# Altium PCB PCB1.PcbDoc (part 2 of 2)
Units mil, origin at the board's own origin, x right, y up, seen from the top; angles counter-clockwise.
Board outline 2755.91 x 2755.91 mil, 4 copper layers (Top Layer, Layer 1, Layer 2, Bottom Layer), stack 23.756 mil thick; 63 components, 137 nets, 462 pads, 284 vias.
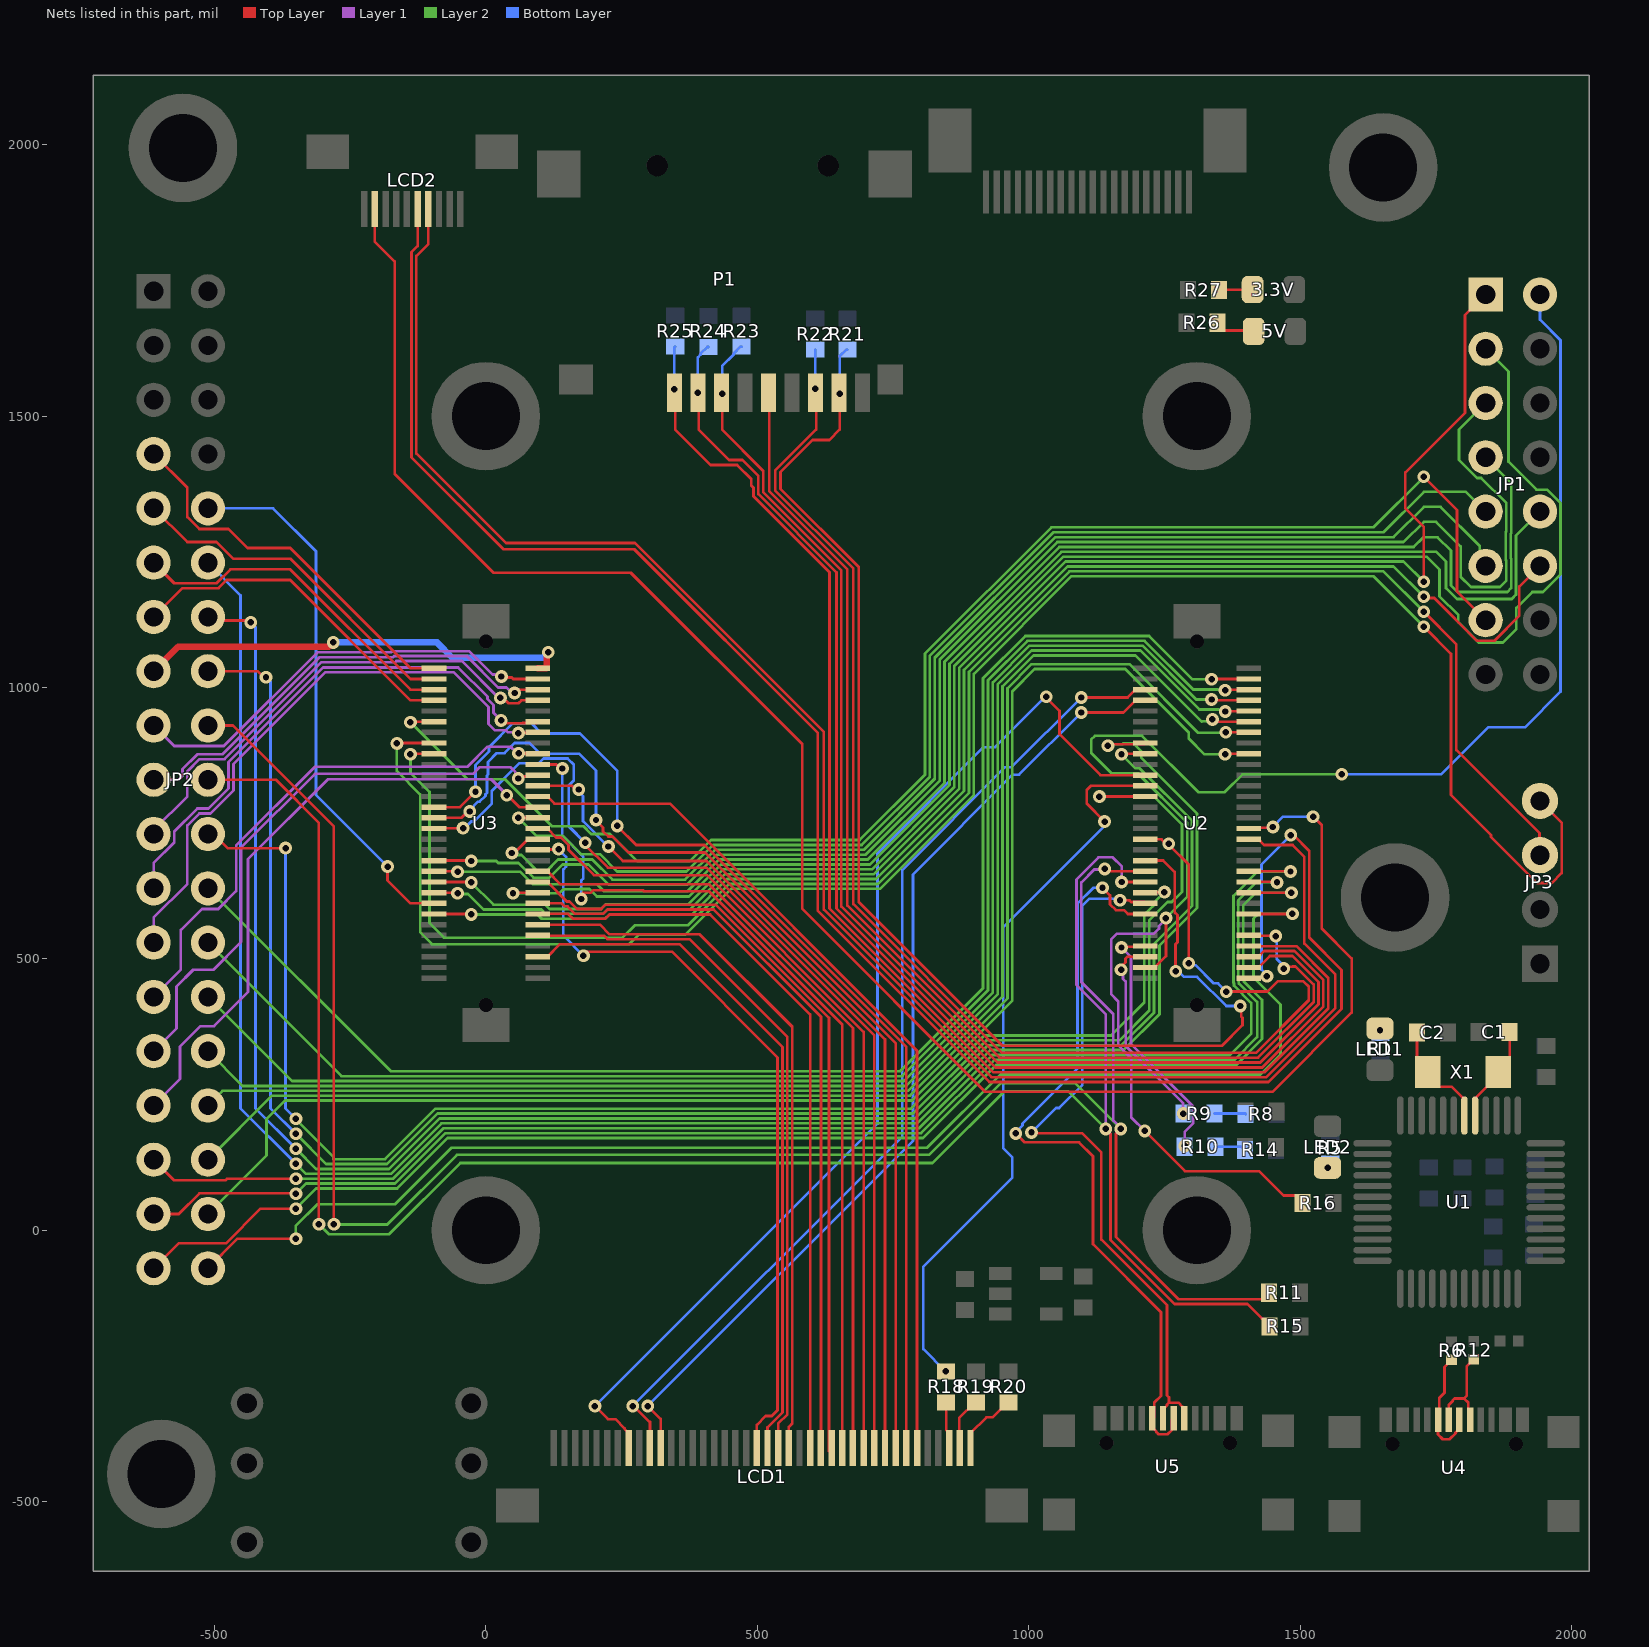
[diagram p4: the nets of this part, all layers, seen from the top]

## Via types
v1: diameter 23.62, hole 11.81, Top Layer to Bottom Layer, tented both sides, 284 vias

## Nets (pads, with @x,y where several pads share a name; then routed paths per layer and width w, separated by ;. In a path a pad name is that pad's centre, name@x,y a point inside that pad or via, vN(x,y) a via of type N, cw(c..) or ccw(c..) an arc to the next point about the centre after c; other vN are vias at no path point) (continued)
"LCD_G1 / PJ8": LCD1.20 U3.26 | length 1447.5
  Top Layer w5: U3.26@95.47,700.78 96.24,701.54 133.23,701.54 v1(134,702.31) ; v1(179.7,505.7) 179.7,513.3 342.61,513.3 537.47,318.45 537.47,-331.58 526.74,-342.31 515.19,-342.31 499.16,-358.34 LCD1.20@499.16,-401.24
  Bottom Layer w5: v1(134,702.31) 134,702 148,688 148,670.21 142.69,664.9 142.69,542.7 v1(179.7,505.7)
"LCD_G2 / PJ9": LCD1.27 U3.20 | length 1445.2
  Top Layer w5: U3.20@95.47,641.72 113.19,641.72 149.09,605.82 154.28,605.82 168.1,592 212.39,592 220.33,599.94 423.48,599.94 632,391.42 LCD1.27@632,-407
"LCD_G3 / PJ10": LCD1.26 U3.16 | length 1409.6
  Top Layer w5: U3.16@95.47,602.35 139.83,602.35 145.36,596.82 150.55,596.82 164.37,583 216.12,583 224.06,590.94 419.75,590.94 617.27,393.43 LCD1.26@617.27,-401.24
"LCD_G4 / PJ11": LCD1.25 U3.14 | length 1384.3
  Top Layer w5: U3.14@95.47,582.67 95.7,582.9 151.74,582.9 160.64,574 219.85,574 227.79,581.94 413.17,581.94 597.58,397.53 LCD1.25@597.58,-401.24
"LCD_G5 / PK0": LCD1.23 U3.12 | length 1325.7
  Top Layer w5: U3.12@95.47,562.98 210.13,562.98 227.79,545.32 394.11,545.32 564.47,374.97 564.47,-356 558.21,-362.26 LCD1.23@558.21,-401.24
"LCD_G6 / PK1": LCD1.22 U3.10 | length 1301.9
  Top Layer w5: U3.10@95.47,543.3 95.93,542.84 217.54,542.84 224.06,536.32 375.27,536.32 555.47,356.13 555.47,-339.04 538.53,-355.98 LCD1.22@538.53,-401.24
"LCD_G7 / PK2": LCD1.21 U3.6 | length 1289.3
  Top Layer w5: U3.6@95.47,503.93 113.19,503.93 136.48,527.22 356.53,527.22 546.47,337.29 546.47,-335.31 518.85,-362.93 LCD1.21@518.84,-401.24
"LCD_HS / PI12": LCD1.11 U2.53 | length 1829.7
  Top Layer w5: v1(298.18,-324) 321.99,-347.81 LCD1.11@321.99,-401.24 ; v1(1097,953.98) 1174.43,953.98 1196.82,976.37 U2.53@1214.54,976.37
  Bottom Layer w5: v1(298.18,-324) 786.89,164.71 786.89,655.6 970.64,839.36 982.38,839.36 v1(1097,953.98)
"LCD_R0 / PI15": LCD1.28 U3.42 | length 1681.8
  Top Layer w5: U3.42@95.47,858.26 129.7,858.26 137.27,850.69 v1(141,850.69) ; v1(175.68,610.31) 178.99,613.62 178.99,621.76 193.13,621.76 197.72,626.36 289.36,626.36 291.05,624.66 411.49,624.66 656.64,379.51 LCD1.28@656.64,-401.24
  Bottom Layer w5: v1(141,850.69) 141,727 179.31,688.69 179.31,648.04 175.91,644.64 175.91,610.54 v1(175.68,610.31)
"LCD_R1 / PJ0": LCD1.32 U3.38 | length 1609
  Top Layer w5: U3.38@94.1,817.51 U3.38@95.47,818.89 ; U3.38@104.33,818.89 159.07,818.89 165.96,812 v1(171,812) ; v1(225.71,707.01) 252.39,680.34 406.72,680.34 735.38,351.68 LCD1.32@735.38,-401.24
  Bottom Layer w5: v1(171,812) 171,807.76 179,799.76 179,753.73 225.44,707.29 225.71,707.29 v1(225.71,707.01)
"LCD_R2 / PJ1": LCD1.35 U3.36 | length 1625
  Top Layer w5: U3.36@95.47,799.2 113.19,799.2 126.39,786 339.25,786 794.43,330.81 LCD1.35@794.43,-401.24
"LCD_R3 / PJ2": LCD1.34 U3.33 | length 2013.5
  Top Layer w5: U3.33@-95.46,779.52 -47.48,779.52 v1(-19,808) ; v1(242,745) 277.13,709.87 402.65,709.87 774.75,337.77 LCD1.34@774.75,-401.24
  Bottom Layer w5: v1(-19,808) -19,857 5.93,881.93 5.93,889.93 50.35,934.35 83.65,934.35 102.69,915.31 173.51,915.31 242,846.82 v1(242,745)
"LCD_R4 / PJ3": LCD1.33 U3.31 | length 1976.1
  Top Layer w5: U3.31@-95.47,759.83 -45.34,759.83 -33.62,771.55 v1(-29.55,771.55) ; v1(202.95,755.95) 202.95,754.79 216.03,741.72 216.03,734.97 225.68,725.32 233.3,725.32 262.67,695.95 403.84,695.95 755.06,344.73 LCD1.33@755.06,-401.24
  Bottom Layer w5: v1(-29.55,771.55) -29.55,774.45 -14.31,789.69 -11.42,789.69 -0.69,800.42 -0.69,803.31 2,806 2,838 4,840 4,862.79 20.13,878.92 34.31,878.92 53.02,897.63 80.37,897.63 99.85,878.15 171.85,878.15 202.95,847.05 v1(202.95,755.95)
"LCD_R5 / PJ4": LCD1.31 U3.29 | length 1931.5
  Top Layer w5: U3.29@-95.46,740.15 -95.03,740.57 -42.43,740.57 v1(-42,741) ; v1(183,714) 183,710 224.89,668.11 406.22,668.11 715.69,358.64 LCD1.31@715.69,-401.24
  Bottom Layer w5: v1(-42,741) -39.17,741 -26.93,753.24 -21.97,753.24 11,786.21 11,809.72 61.95,860.67 98.04,860.67 106.37,869 150.74,869 162,857.74 162,828.9 152.69,819.58 152.69,744.31 v1(183,714)
"LCD_R6 / PJ5": LCD1.30 U3.30 | length 1527.7
  Top Layer w5: U3.30@95.47,740.15 113.19,740.15 129.52,723.81 138.4,723.81 152.31,709.9 152.31,701.02 199.14,654.19 407.41,654.19 696.01,365.6 LCD1.30@696.01,-401.24
"LCD_R7 / PJ6": LCD1.29 U3.22 | length 1474.3
  Top Layer w5: U3.22@95.47,661.41 113.19,661.41 137.28,637.31 411.57,637.31 676.32,372.55 LCD1.29@676.32,-401.24
"LCD_VS / PI13": LCD1.10 U2.55 | length 1870.7
  Top Layer w5: v1(270.56,-324) 272.29,-324 300.81,-352.53 302.31,-352.53 LCD1.10@302.31,-401.24 ; v1(1097,981.6) 1182.37,981.6 1196.82,996.05 U2.55@1214.54,996.05
  Bottom Layer w5: v1(270.56,-324) 767.2,172.65 767.2,663.75 956.73,853.27 968.68,853.27 v1(1097,981.6)
"LED / PC13": JP2.16 U2.35 | length 3318.2
  Top Layer w5: JP2.16@-512,1030 -421.04,1030 -410.04,1019 v1(-405,1019) ; v1(1130.4,799) 1130.6,799.2 U2.35@1214.54,799.2
  Layer 2 w5: v1(-350,177.87) -294.13,122 -182.1,122 -89.1,215 786.9,215 921.9,350 1167.54,350 1222,404.46 1222,571 1255.69,604.69 1263.69,604.69 1282.45,623.45 1282.45,747.82 1231.27,799 v1(1130.4,799)
  Bottom Layer w5: v1(-405,1019) -396.62,1010.62 -396.62,224.49 v1(-350,177.87)
NetC1_1: C1.1 U1.5 X1.1 | length 180.2
  Top Layer w5: U1.5@1822.53,211.45 1822.53,242.76 1865.11,285.34 X1.1@1865.11,291.25 1886.15,312.29 C1.1@1886.15,365.25
NetC2_1: C2.1 U1.6 X1.2 | length 180.8
  Top Layer w5: X1.2@1715.61,304.93 C2.1@1715.61,364.25 ; X1.2@1735.19,291.25 1735.19,285.34 1756.31,264.22 1779.6,264.22 1802.84,240.98 U1.6@1802.84,211.45
NetLCD1_38: LCD1.38 R18.1 | length 86.4
  Top Layer w5: R18.1@848,-317.09 848,-368.2 853.49,-373.69 LCD1.38@853.49,-401.24
NetLCD1_39: LCD1.39 R19.1 | length 98.7
  Top Layer w5: LCD1.39@873.17,-401.24 872,-400.07 872,-346.03 901.03,-317 R19.1@903,-317
NetLCD1_40: LCD1.40 R20.1 | length 121.2
  Top Layer w5: LCD1.40@892.86,-401.24 892.86,-373.69 922,-344.54 933.49,-344.54 961.03,-317 R20.1@963,-317
NetLED1_1: LED1.1 R1.2 | length 3
  Top Layer w5: v1(1647.22,368.69) LED1.1@1647.22,371.69
NetLED2_1: LED2.1 R5.2 | length 0.4
  Top Layer w5: LED2.1@1550.78,114.91 v1(1550.78,115.31)
NetLED3_1: 5V.1 R26.2 | length 74.8
  Top Layer w5: R26.2@1347.54,1672 1347.54,1670.03 1359.81,1657.77 1412.82,1657.77 5V.1@1414.6,1656
NetLED4_1: 3.3V.1 R27.2 | length 62.5
  Top Layer w5: R27.2@1350.54,1732 1351.54,1733 3.3V.1@1412.6,1733
NetR6_2: R6.2 U4.A7 U4.B7 | length 226.2
  Top Layer w5: R6.2@1779,-238.73 1766,-251.73 1766,-299.29 1756.43,-308.86 1756.43,-336.81 1754.25,-339 U4.B7@1754.25,-349 1754.25,-376.25 1762.93,-384.93 1775.74,-384.93 1786.34,-374.33 1786.34,-373.01 1790.21,-369.14 1790.21,-342.41 U4.A7@1793.62,-339
NetR8_2: R8.2 R9.1 | length 57.8
  Bottom Layer w5: R9.1@1342.54,215 1398.91,215 R8.2@1399.91,214
NetR10_1: R10.1 R14.2 | length 56.4
  Bottom Layer w5: R10.1@1344.54,154 1392.46,154 R14.2@1398.46,148
NetR12_2: R12.2 U4.A6 U4.B6 | length 164.2
  Top Layer w5: U4.A6@1773.93,-339 1773.93,-322.27 1781.21,-314.99 1781.21,-313.67 1785.02,-309.86 1802.22,-309.86 ; U4.B6@1813.3,-339 1809.9,-335.59 1809.9,-317.54 1802.22,-309.86 ; R12.2@1820,-237.73 1807,-250.73 1807,-305.08 1802.22,-309.86
OLED_SCL: JP3.3 U3.43 | length 3189.2
  Top Layer w5: v1@-137.89,877.94 U3.43@-95.46,877.94 ; v1(1728,1139.51) 1788,1079.51 1788,885 1941.04,731.96 1941.04,691.96 JP3.3@1942,691
  Layer 2 w5: v1(-138.93,876.9) -138.93,842.67 -104,807.74 -104,566 -77,539 251.39,539 274.39,562 372.27,562 448.27,638 722.27,638 890,805.73 890,1028.73 1075.27,1214 1653.51,1214 v1(1728,1139.51)
OLED_SDA: JP3.4 U3.45 | length 3502.1
  Top Layer w5: v1@-163.21,897.63 U3.45@-95.46,897.63 ; v1(1728,1111.89) 1778,1061.89 1778,802 1851.72,728.28 1851.72,724.76 1936.48,640 1964,640 1981.96,657.96 1981.96,751.04 JP3.4@1942,791
  Layer 2 w5: v1(-163.93,896.9) -163.93,845.93 -121,803 -121,549.15 -99.08,527.22 264.22,527.22 282,545 368,545 452,629 726,629 899,802 899,1025 1079,1205 1634.89,1205 v1(1728,1111.89)
OPENMV_P0: JP1.1 U3.17 | length 2859.1
  Top Layer w5: U3.17@-95.47,622.04 -53.04,622.04 v1(-52,621) ; v1(1728,1194.76) 1728,1296 1694,1330 1694,1396 1804,1506 1804,1686 JP1.1@1842,1724
  Layer 2 w5: v1(-52,621) -50.69,619.69 -32.69,619.69 -3.94,590.94 102.2,590.94 110.15,583 216.12,583 224.49,591.38 376.19,591.38 440.82,656 714.82,656 872,813.18 872,1036.18 1067.82,1232 1690.76,1232 v1(1728,1194.76)
OPENMV_P1: JP1.3 U3.19 | length 3156.3
  Top Layer w5: U3.19@-95.47,641.72 -27.72,641.72 v1(-27,641)
  Layer 2 w5: v1(-27,641) 14.06,599.94 109.34,599.94 117.28,592 212.39,592 220.77,600.38 372.47,600.38 437.09,665 711.09,665 863,816.91 863,1039.91 1064.09,1241 1733,1241 1757,1217 1757,1168 1791.63,1133.37 1791.63,1120.63 1829.27,1083 1874,1083 1898.5,1107.5 1898.5,1146.5 1928,1176 1947.73,1176 1980,1208.26 1980,1339.74 1955.37,1364.37 1935.63,1364.37 1884,1416 1884,1582 JP1.3@1842,1624
OPENMV_P2: JP1.5 U3.23 | length 2896.5
  Top Layer w5: U3.23@-95.46,681.09 v1@-27.73,681.09
  Layer 2 w5: v1(-27,680.37) 19.12,680.37 22.79,676.69 60.31,676.69 87.45,649.55 116.93,649.55 141.31,673.93 189.07,673.93 226,637 370.9,637 425.9,692 699.9,692 836,828.1 836,1051.1 1052.9,1268 1690.76,1268 1728,1305.24 1750.76,1305.24 1796,1260 1796,1204 1815,1185 1868.07,1185 1880,1196.93 1880,1233.54 1879,1234.54 1879,1286.64 1880,1287.64 1880,1339.74 1833.73,1386 1826.27,1386 1793,1419.27 1793,1475 JP1.5@1842,1524
OPENMV_P3: JP1.7 U3.21 | length 2742.5
  Top Layer w5: U3.21@-95.47,661.4 v1@-53.04,661.4
  Layer 2 w5: v1(-52,660.37) 63.63,660.37 86.69,637.31 168.58,637.31 168.9,637.62 204.38,637.62 217.34,624.66 371.29,624.66 429.63,683 703.63,683 845,824.37 845,1047.37 1056.63,1259 1709.38,1259 1726.96,1276.58 1753.42,1276.58 1778,1252 1778,1188 1790,1176 1882.07,1176 1889,1182.93 1889,1237.27 1888,1238.27 1888,1282.91 1889,1283.91 1889,1377 JP1.7@1842,1424
OPENMV_P4: JP1.9 U3.32 | length 2294
  Top Layer w5: v1(59.95,759.83) U3.32@95.47,759.83
  Layer 2 w5: v1(59.95,759.83) 92.78,727 141,727 175,693 210,693 242,661 369.45,661 418.45,710 692.45,710 818,835.55 818,1058.55 1045.45,1286 1653.51,1286 1728,1360.49 1805.51,1360.49 JP1.9@1842,1324
OPENMV_P5: JP1.11 U3.28 | length 2365.6
  Top Layer w5: v1(48,695) 52.3,695 77.76,720.46 U3.28@95.47,720.46
  Layer 2 w5: v1(48,695) 51.56,691.44 65.44,691.44 95.47,661.41 111.41,661.41 132.93,682.93 196.07,682.93 233,646 367.18,646 422.18,701 696.18,701 827,831.82 827,1054.82 1049.18,1277 1672.13,1277 1728,1332.87 1759.13,1332.87 1830.9,1261.1 1830.9,1235.1 JP1.11@1842,1224
OPENMV_P6: JP1.13 U3.49 | length 2750.4
  Top Layer w5: v1@-137.89,937 U3.49@-95.46,937 ; v1(1728,1388.11) 1789,1327.11 1789,1177 JP1.13@1842,1124
  Layer 2 w5: v1(-138.93,935.96) -33.97,831 35,831 46.14,819.86 121.69,744.31 179.69,744.31 193.85,730.15 228.47,730.15 278.29,680.34 376.06,680.34 414.72,719 688.72,719 809,839.28 809,1062.28 1041.72,1295 1634.89,1295 v1(1728,1388.11)
OPENMV_P7: JP1.12 U3.13 | length 2584.9
  Top Layer w5: U3.13@-95.47,582.67 v1@-27.72,582.67 ; v1(1728,1167.13) 1730.18,1164.95 1747.31,1164.95 1826.26,1086 1857.74,1086 1904,1132.27 1904,1186 JP1.12@1942,1224
  Layer 2 w5: v1(-27,581.94) 95.06,581.94 103,574 219.85,574 227.79,581.94 379.49,581.94 444.54,647 718.54,647 881,809.46 881,1032.46 1071.54,1223 1672.13,1223 v1(1728,1167.13)
OPENMV_P8: JP1.10 U3.18 | length 2535.6
  Top Layer w5: v1(50,621) 51.04,622.04 U3.18@95.47,622.04
  Layer 2 w5: v1(50,621) 136.06,621 143.37,628.31 172.31,628.31 172.62,628.62 190.9,628.62 204.52,615 374.36,615 433.36,674 707.36,674 854,820.64 854,1043.64 1060.36,1250 1751,1250 1769,1232 1769,1183 1789,1163 1890,1163 1898,1171 1898,1280 JP1.10@1942,1324
OPENMV_RESET: JP1.2 R16.2 U2.3 | length 3145.1
  Top Layer w5: v1(1214,183) 1288,109 1424.78,109 1469.55,64.23 1492.19,64.23 1504.46,51.97 R16.2@1504.46,50 ; U2.3@1214.53,484.24 1232.25,484.24 1253,504.99 1253,574.87 v1(1252.76,575.11)
  Layer 1 w5: v1(1214,183) 1189,208 1189,317 1165,341 1165,422 1151.97,435.03 1151.97,535.97 1162.46,546.46 1230.74,546.46 1239.97,555.69 1239.97,560.59 1252.76,573.39 v1(1252.76,575.11)
  Layer 2 w5: v1(1252.76,575.11) 1292,614.35 1292,751 1201,842 1153,842 1115.27,879.73 1115.27,904.27 1122,911 1209,911 1313,807 1361,807 1394,840 v1(1577,840)
  Bottom Layer w5: v1(1577,840) 1760,840 1846.5,926.5 1914.23,926.5 1980,992.27 1980,1639.74 1942,1677.73 JP1.2@1942,1724
PA0: JP2.29 U3.40 | length 1086.2
  Top Layer w5: v1(59.54,832.36) 63.1,835.92 69.86,835.92 70.08,836.15 93.05,836.15 U3.40@95.47,838.57
  Layer 1 w5: JP2.29@-612,330 -569.95,372.05 -569.95,449.05 -539,480 -502,480 -451,531 -451,705 -315,841 -24,841 -11.98,853.02 45.5,853.02 54.34,844.18 54.34,842.6 59.54,837.4 v1(59.54,832.36)
PA0_C: JP2.9 U3.57 | length 646.7
  Top Layer w5: JP2.9@-612,1330 -550,1268 -496.26,1268 -465.58,1237.31 -360.32,1237.31 -138.74,1015.74 U3.57@-95.46,1015.74
PA1: JP2.27 U3.44 | length 995.6
  Top Layer w5: v1(60.28,878.98) 60.8,878.46 94.95,878.46 U3.44@95.47,877.94
  Layer 1 w5: JP2.27@-612,430 -561.95,480.05 -561.95,553.05 -523,592 -493,592 -460,625 -460,708.73 -314.73,854 -34,854 3,891 44.98,891 57,878.98 v1(60.28,878.98)
PA1_C: JP2.11 U3.55 | length 634.7
  Top Layer w5: JP2.11@-612,1230 -574,1192 -496.26,1192 -470.64,1217.63 -360.32,1217.63 -138.74,996.05 U3.55@-95.46,996.05
PA2: JP2.23 U3.50 | length 997.8
  Top Layer w5: v1(28.18,939.31) 33.22,939.31 38.18,934.35 67.89,934.35 68.12,934.58 93.05,934.58 U3.50@95.47,937
  Layer 1 w5: JP2.23@-612,630 -612,676.27 -574,714.26 -574,734.46 -531.47,777 -511.27,777 -474,814.26 -474,862.72 -299.73,1037 -51,1037 3,983 3,978.73 14,967.73 14,953.49 v1(28.18,939.31)
PA3: JP2.13 U3.53 | length 636.5
  Top Layer w5: JP2.13@-612,1130 -559,1183 -492.53,1183 -477.59,1197.94 -360.32,1197.94 -138.74,976.37 U3.53@-95.46,976.37
PA8: JP2.22 U2.17 | length 2631.1
  Top Layer w5: JP2.22@-512,730 -501.73,730 -475.73,704 v1(-369,704) ; U2.17@1214.53,622.04 1215.49,623 v1(1250,623)
  Layer 2 w5: v1(-350,205.49) -350,203.76 -281,134.76 -281,131 -185.82,131 -92.82,224 783.18,224 918.18,359 1152,359 1213,420 1213,581.14 1229,597.14 1229,602 v1(1250,623)
  Bottom Layer w5: v1(-369,704) -369,224.49 v1(-350,205.49)
PA15: LCD2.5 U2.2 | length 3583.2
  Top Layer w5: LCD2.5@-125.67,1881.49 -125.67,1813.33 -137,1802 -137,1424 32.31,1254.69 273.46,1254.69 611.3,916.84 611.3,589.27 927.57,273 1441.54,273 1576.31,407.77 1576.31,479.69 1517,539 1517,698.73 1487.73,728 v1(1483,728) ; U2.2@1405.47,464.56 1407.13,466.22 1437.36,466.22 v1(1439.02,467.88)
  Bottom Layer w5: v1(1439.02,467.88) 1439.02,470.1 1429,480.12 1429,674 v1(1483,728)
PB3: JP2.34 U2.48 | length 2682.9
  Top Layer w5: v1(1363.19,917.41) v1(1363.19,917.41) 1405.42,917.36 U2.48@1405.47,917.31
  Layer 2 w5: JP2.34@-512,130 -394,248 781.72,248 961,427.28 961,998.36 1005.64,1043 1185.73,1043 1312.17,916.56 1362.34,916.56 v1(1363.19,917.41)
PB4: JP2.36 U2.44 | length 2776.7
  Top Layer w5: v1@1363.04,877.94 U2.44@1405.47,877.94
  Layer 2 w5: JP2.36@-512,30 -404,138 -404,205 -370,239 785.45,239 970,423.55 970,993.12 1010.88,1034 1178,1034 1295,917 1295,906 1324.1,876.9 v1(1362,876.9)
PB5: JP2.32 U2.50 | length 2649.2
  Top Layer w5: v1(1338.54,941.31) 1343.58,941.31 1347.9,937 U2.50@1405.47,937
  Layer 2 w5: JP2.32@-512,230 -485,257 777.99,257 952,431.01 952,1002.09 1008.91,1059 1197,1059 1318.67,937.33 1319.23,937.9 1335.13,937.9 v1(1338.54,941.31)
PB6: JP2.30 U2.52 | length 2657.6
  Top Layer w5: v1(1362.11,955.71) 1362.6,956.2 1404.99,956.2 U2.52@1405.47,956.68
  Layer 2 w5: JP2.30@-512,330 -448,266 774.26,266 943,434.74 943,1005.82 1005.18,1068 1206,1068 1314.38,959.62 1346.13,959.62 1346.48,959.28 1358.55,959.28 v1(1362.11,955.71)
PB7: JP2.28 U2.54 | length 2690.1
  Top Layer w5: v1(1337,977.93) 1338.57,976.37 U2.54@1405.47,976.37
  Layer 2 w5: JP2.28@-512,430 -357,275 770.54,275 934,438.46 934,1009.54 1001.46,1077 1209.73,1077 1308.79,977.93 v1(1337,977.93)
PB8: JP2.14 U2.43 | length 3408.8
  Top Layer w5: JP2.14@-512,1130 -505.56,1123.56 -436.56,1123.56 v1(-433,1120) ; v1@1172.11,877.94 U2.43@1214.54,877.94
  Layer 2 w5: v1(-350,150.24) -312.76,113 -178.37,113 -85.37,206 790.63,206 925.63,341 1171.27,341 1231,400.73 1231,527.46 1301,597.46 1301,754.73 1204.73,851 1196.97,851 v1(1171.07,876.9)
  Bottom Layer w5: v1(-433,1120) -424.24,1111.24 -424.24,224.49 v1(-350,150.24)
PB9: JP2.12 U2.45 | length 3590.2
  Top Layer w5: v1(1146.07,892.69) 1148.6,895.22 1212.12,895.22 U2.45@1214.54,897.63
  Layer 2 w5: v1(-350,122.62) -331.38,104 -174.64,104 -81.64,197 794.36,197 929.36,332 1175,332 1241,398 1241,524.73 1310,593.73 1310,768 1207.37,870.63 1207.37,882.63 1193.1,896.9 1174.21,896.9 1172.52,895.22 1148.6,895.22 v1(1146.07,892.69)
  Bottom Layer w5: JP2.12@-512,1230 -451.87,1169.87 -451.87,224.49 v1(-350,122.62)
PC1: JP2.19 U3.56 | length 840.1
  Top Layer w5: v1(52.94,989.85) 56.78,989.85 62.99,996.06 U3.56@95.47,996.05
  Layer 1 w5: JP2.19@-612,830 -565.73,830 -559,836.74 -559,849.47 -531.47,877 -485.19,877 -306.49,1055.69 -170.97,1055.69 -168.73,1057.93 -35.23,1057.93 22.7,1000 37.74,1000 47.9,989.85 v1(52.94,989.85)
PC2: JP2.25 U3.48 | length 1097.3
  Top Layer w5: v1(59.95,916.04) 60.59,916.67 94.83,916.67 U3.48@95.47,917.31
  Layer 1 w5: JP2.25@-612,530 -612,576.27 -550,638.27 -550,745.74 -527.74,768 -507.54,768 -465,810.53 -465,859 -296,1028 -59,1028 5,964 5,933 17,921 37,921 40.64,917.36 58.62,917.36 v1(59.95,916.04)
PC2_C: JP2.17 U3.58 | length 816.9
  Top Layer w5: v1(28.66,1020.23) 30.66,1018.24 47.98,1018.24 50.48,1015.74 U3.58@95.47,1015.74
  Layer 1 w5: JP2.17@-612,930 -574,892 -482.91,892 -310.22,1064.69 -174.7,1064.69 -172.46,1066.93 -31,1066.93 12.13,1023.79 25.1,1023.79 v1(28.66,1020.23)
PC3: JP2.31 U3.34 | length 1156.9
  Top Layer w5: v1(38.55,801.55) 39.45,801.55 61.48,779.52 U3.34@95.47,779.52
  Layer 1 w5: JP2.31@-612,230 -563.45,278.55 -563.45,338.55 -526,376 -501,376 -438,439 -438,684 -291,831 10,831 38.55,802.45 v1(38.55,801.55)
PC3_C: JP2.21 U3.54 | length 905.6
  Top Layer w5: v1(26.85,980.78) 31.88,980.78 41.76,970.9 58.69,970.9 58.76,970.97 59.96,970.97 65.35,976.37 U3.54@95.47,976.37
  Layer 1 w5: JP2.21@-612,730 -612,737.46 -550,799.46 -550,845.74 -527.74,868 -481.46,868 -302.77,1046.69 -167.24,1046.69 -165,1048.93 -44.33,1048.93 23.82,980.78 v1(26.85,980.78)
PC8: P1.7 R22.2 U2.27 | length 2665.9
  Top Layer w5: P1.7@607,1543 v1(607,1550) ; P1.7@608.54,1541.46 608.54,1475.26 533,1399.73 533,1363.27 677,1219.27 677,600.86 950.86,327 1419.18,327 1516,423.82 1516,448.73 1506,458.73 1458.73,458.73 1440,440 1364.72,440 v1(1364.03,439.32) ; U2.27@1214.54,720.46 1214.71,720.28 1244.68,720.28 1252.96,712 v1(1258,712) 1258,710.69 1295,673.69 v1(1295,492)
  Bottom Layer w5: v1(607,1550) R22.2@607,1622.46 ; v1(1295,492) 1298.56,488.44 1307.42,488.44 1341,454.85 1348.72,454.85 1364.03,439.54 v1(1364.03,439.32)
PC9: P1.8 R21.2 U2.23 | length 2411.9
  Top Layer w5: v1(651.84,1541.46) 651.84,1475 632.84,1456 602,1456 543,1397 543,1366 687,1222 687,605 952.04,339.96 1356,339.96 1394,377.95 1394,391.44 1391.5,393.94 1391.5,411.69 v1(1389.94,413.25) ; U2.23@1214.54,681.09 1247.91,681.09 1269,660 1269,585.9 1274.14,580.75 1274.14,530.61 1270.55,527.02 1270.55,477.76 v1(1271.05,477.26)
  Bottom Layer w5: v1(651.84,1541.46) 651.84,1610.19 664.11,1622.46 R21.2@666,1622.46 ; v1(1271.05,477.26) 1276.09,477.26 1286.35,467 1310.45,467 1364.2,413.25 v1(1389.94,413.25)
PC10: P1.1 R25.2 U2.8 | length 2500.6
  Top Layer w5: P1.1@347.16,1543 v1(347.16,1549.38) ; P1.1@348.69,1541.46 348.69,1475 413.69,1410 463,1410 489,1384 489,1372 493,1368 493,1352.36 633,1212.36 633,593.02 935.02,291 1434.09,291 1552,408.91 1552,465.05 1493.55,523.5 1405.58,523.5 U2.8@1405.47,523.61
  Bottom Layer w5: v1(347.16,1549.38) 347.16,1626.07 R25.2@349,1627.91
PC11: P1.2 R24.2 U2.6 | length 2442
  Top Layer w5: v1(390.46,1543) 392,1541.46 392,1475 448,1419 473,1419 502,1390 502,1356.09 646,1212.09 646,592.75 938.75,300 1430.36,300 1543,412.64 1543,461.33 1489.83,514.5 1433.76,514.5 1423.19,503.93 U2.6@1405.47,503.93
  Bottom Layer w5: v1(390.46,1543) 390.46,1607.92 395.77,1613.22 395.77,1615.19 408.03,1627.46 R24.2@410,1627.46
PC12: P1.5 U2.10 | length 2239.8
  Top Layer w5: P1.5@521.92,1541.46 521.92,1361.62 665.92,1217.62 665.92,598.29 946.21,318 1422.9,318 1525,420.1 1525,452.73 1491.81,485.92 1486.81,485.92 1486.46,485.56 1473.56,485.56 v1(1470,482) ; U2.10@1405.47,543.3 1406.12,542.65 1454.66,542.65 v1(1455.31,542)
  Bottom Layer w5: v1(1455.31,542) 1457.08,540.23 1457.08,499.93 1470,487.01 v1(1470,482)
PD2: P1.3 R23.2 U2.4 | length 2381.5
  Top Layer w5: P1.3@433.77,1543 v1(435.31,1541.46) 435.31,1475 511,1399.31 511,1359.82 655,1215.82 655,596.48 942.48,309 1426.63,309 1534,416.37 1534,457.6 1486.1,505.5 1444.44,505.5 1423.19,484.24 U2.4@1405.47,484.24
  Bottom Layer w5: v1(435.31,1541.46) 435.31,1592.22 456.77,1613.68 456.77,1615.65 469.03,1627.91 R23.2@471,1627.91
PD4: JP2.38 U2.14 | length 2580.1
  Top Layer w5: JP2.38@-512,-70 -457.49,-15.49 v1(-350,-15.49) ; U2.14@1405.47,582.67 1485.67,582.67 v1(1486,583)
  Layer 2 w5: v1(-350,-15.49) -350,8.47 -310.47,48 -167,48 -63,152 813,152 948,287 1427,287 1464,324 1464,416 1414.33,465.67 1414.33,574.33 1423,583 v1(1486,583)
PD5: JP2.35 U2.20 | length 2562.4
  Top Layer w5: JP2.35@-612,30 -565.73,30 -527.74,68 -350.62,68 v1(-350,67.38) ; U2.20@1414,642 v1@1456.43,642
  Layer 2 w5: v1(-350,67.38) -331.38,86 -167.18,86 -74.18,179 801.82,179 936.82,314 1379,314 1421,356 1421,420.82 1387.33,454.49 1387.33,458.9 1386.24,459.99 1386.24,608.24 1418.96,640.96 v1(1457.47,640.96)
PD6: JP2.33 U2.22 | length 2608.9
  Top Layer w5: JP2.33@-612,130 -574,92 -480,92 -477,95 v1(-350,95) ; U2.22@1414,661.69 v1@1481.74,661.69
  Layer 2 w5: v1(-350,95) -170.91,95 -77.91,188 798.09,188 933.09,323 1371,323 1410,362 1410,419.09 1378.33,450.76 1378.33,455.18 1377.24,456.26 1377.24,616.24 1421.96,660.96 v1(1482.47,660.96)
PD7: JP2.37 U2.18 | length 2654.4
  Top Layer w5: JP2.37@-612,-70 -566,-24 -478.73,-24 -414.97,39.76 v1(-350,39.76) ; U2.18@1405.47,622.04 v1(1484,622)
  Layer 2 w5: v1(-350,39.76) -312.76,77 -163.46,77 -70.46,170 805.54,170 940.54,305 1382.73,305 1430,352.27 1430,424.54 1396.33,458.22 1396.33,462.63 1395.24,463.72 1395.24,598.24 1419,622 v1(1484,622)
PD11: JP2.10 U3.15 | length 995.8
  Top Layer w5: v1(-181,670) -181,644.61 -138.74,602.35 U3.15@-95.47,602.35
  Bottom Layer w5: JP2.10@-512,1330 -392,1330 -313,1251 -313,802 v1(-181,670)
PE2: JP2.24 U2.58 | length 2756.2
  Top Layer w5: v1@1337.73,1015.74 U2.58@1405.47,1015.74
  Layer 2 w5: JP2.24@-512,630 -175,293 763.08,293 916,445.92 916,1017 994,1095 1222,1095 1301.99,1015.01 v1(1337,1015.01)
PE3: JP2.26 U2.56 | length 2722.7
  Top Layer w5: v1@1363.04,996.05 U2.56@1405.47,996.05
  Layer 2 w5: JP2.26@-512,530 -266,284 766.81,284 925,442.19 925,1013.27 997.73,1086 1213.46,1086 1303.21,996.24 1360.77,996.24 v1(1362,995.01)
PG13: LCD2.9 U2.30 | length 3494.2
  Top Layer w5: LCD2.9@-204.41,1881.49 -204.41,1821.04 -168,1784.63 -168,1393.76 14.38,1211.38 267,1211.38 583,895.38 583,592.11 920.11,255 1449,255 1595,401 1595,501 1540,556 1540,747.03 1525.03,762 v1(1524,762) ; U2.30@1405.47,740.15 1406.9,741.57 1448.57,741.57 v1(1450,743)
  Bottom Layer w5: v1(1450,743) 1469,762 v1(1524,762)
PG14: LCD2.4 U2.28 | length 3291.5
  Top Layer w5: LCD2.4@-105.98,1881.49 -105.98,1817.02 -128,1795 -128,1431 37,1266 274.87,1266 622.62,918.25 622.62,590.68 931.3,282 1437.82,282 1565,409.18 1565,471 1508,528 1508,688.03 1486.34,709.69 1433.96,709.69 1423.19,720.46 U2.28@1405.47,720.46
PI8: LCD1.8 U2.39 | length 2043.3
  Top Layer w5: v1(201,-324) 225,-348 238.57,-348 255.66,-365.09 255.66,-366.41 262.94,-373.69 LCD1.8@262.94,-401.24 ; v1(1032.31,983) 1032.31,981.69 1057,957 1057,914 1132.43,838.57 U2.39@1214.54,838.57
  Bottom Layer w5: v1(201,-324) 721.37,196.37 721.37,694.37 917,890 938,890 1031,983 v1(1032.31,983)
PI11: R18.2 U2.37 | length 1366
  Top Layer w5: v1(847,-260) R18.2@848,-260 ; v1(1140,753) 1107,786 1107,811 1115,819 1165,819 1214.42,819 U2.37@1214.54,818.89
  Bottom Layer w5: v1(847,-260) 806,-219 806,-67 970,97 970,134.27 953,151.27 953,558 1140,745 v1(1140,753)
"SWCLK / PA14": R10.2 U2.7 | length 472.7
  Top Layer w5: v1(1171,521) 1172.31,522.31 1213.23,522.31 U2.7@1214.53,523.61
  Layer 1 w5: v1(1171,521) 1188.59,503.41 1188.59,342.87 1303,228.46 1303,197 1287.46,181.46 v1(1287.46,155.54)
  Bottom Layer w5: R10.2@1287.46,154 v1(1287.46,155.54)
"SWDIO / PA13": R9.2 U2.5 | length 373.7
  Top Layer w5: v1(1170.28,480) 1170.28,485.04 1178.39,493.15 1178.39,500.39 1181.93,503.93 U2.5@1214.53,503.93
  Layer 1 w5: v1(1170.28,480) 1173.84,476.44 1173.84,463.16 1178.81,458.19 1178.81,339.92 1284.42,234.31 1284.42,215.27 v1(1284.69,215)
"USART1-RX / PA10": JP2.18 R11.2 U2.21 | length 3785.4
  Top Layer w5: JP2.18@-512,930 -465.79,930 -280,744.21 v1(-280,11) ; v1(1140.16,665.84) 1144.6,661.4 U2.21@1214.53,661.4 ; v1(1169.81,186.88) 1161,178.07 1161,-12 1276,-127 1430.46,-127 R11.2@1442.46,-115
  Layer 1 w5: v1(1140.16,665.84) 1139.16,664.85 1120.85,664.85 1097.07,641.07 1097.07,456.97 1156,398.04 1156,202.38 1169.81,188.57 v1(1169.81,186.88)
  Layer 2 w5: v1(-280,11) -279.53,10.53 -181.68,10.53 -53.21,139 816.79,139 948.79,271 1085.69,271 v1(1169.81,186.88)
"USART1-TX / PA9": JP2.20 R15.2 U2.19 | length 3801.8
  Top Layer w5: JP2.20@-512,830 -387,830 -307.62,750.62 v1(-307.62,11) ; v1(1142.19,186.88) 1151,178.07 1151,-18 1269,-136 1403,-136 1429.77,-162.77 1431.74,-162.77 1444,-175.03 R15.2@1444,-177 ; v1(1171.28,641.72) U2.19@1214.53,641.72
  Layer 1 w5: v1(1142.19,186.88) 1142.19,397.71 1088.07,451.82 1088.07,646.21 1128.86,687 1155,687 1171.28,670.72 v1(1171.28,641.72) v1@1171,642
  Layer 2 w5: v1(-307.62,11) -289.31,-7.31 -178.31,-7.31 -47,124 823,124 955,256 1073.07,256 v1(1142.19,186.88)
USB_N/PA11: U2.13 U5.A7 U5.B7 | length 1425.5
  Top Layer w5: v1(976.31,178.53) 976.31,173.8 981.04,173.8 992.84,162 1093,162 1118.64,136.36 1118.64,-25.64 1244,-151 1244,-305 1231.3,-317.7 1231.3,-343.24 U5.B7@1227.9,-346.64 1227.9,-363.37 1235.18,-370.65 1235.18,-371.97 1238.99,-375.78 1256.18,-375.78 1263.86,-368.1 1263.86,-350.05 U5.A7@1267.27,-346.64 ; v1(1136,631) 1150,617 1150,600.42 1160.73,589.69 1175.78,589.69 1182.8,582.67 U2.13@1214.53,582.67
  Bottom Layer w5: v1(976.31,178.53) 976.31,180.84 988.81,193.34 988.81,196.88 1090,298.06 1090,601.73 1119.27,631 v1(1136,631)
USB_P/PA12: U2.15 U5.A6 U5.B6 | length 1325.5
  Top Layer w5: v1(1005.31,180.31) 1006.62,179 1098,179 1134,143 1134,-17 1255,-138 1255,-304 1258.67,-307.67 1258.67,-317.5 ; v1(1168.31,608) 1185.31,608 1188.54,604.77 1212.11,604.77 U2.15@1214.53,602.35 ; U5.A6@1247.58,-346.64 1247.58,-329.91 1254.86,-322.63 1254.86,-321.31 1258.67,-317.5 ; U5.B6@1286.95,-346.64 1283.55,-343.24 1283.55,-325.19 1275.87,-317.5 1258.67,-317.5
  Bottom Layer w5: v1(1005.31,180.31) 1050.28,225.28 1056.28,225.28 1099,268 1099,598 1112,611 1165.31,611 v1(1168.31,608)
VBAT-EXT: JP2.15 U3.60 | length 811.5
  Top Layer w12: JP2.15@-612,1030 -567,1075 -289,1075 v1(-281,1083) ; U3.60@95.47,1035.42 111.03,1035.42 112.11,1036.5 112.11,1058.96 115,1061.86 v1(115,1065)
  Bottom Layer w12: v1(-281,1083) -90,1083 -62,1055 105,1055 v1(115,1065)
VREF: JP2.7 U3.59 | length 711.5
  Top Layer w5: JP2.7@-612,1430 -550,1368 -550,1314.26 -527.74,1292 -474,1292 -439,1257 -360.32,1257 -138.74,1035.42 U3.59@-95.46,1035.42
pads on no net: *1.1 *2.1 *3.1 *4.1 *5.1 *6.1 *7.1 *8.1 Camera1.0 JP1.6 LCD1.0 LCD2.0 P1.0 P1.9 P1.10 U1.2 U1.3 U1.4 U1.10 U1.11 U1.13 U1.15 U1.17 U1.18 U1.19 U1.20 U1.21 U1.22 U1.26 U1.27 U1.28 U1.29 U1.34 U1.37 U1.38 U1.39 U1.40 U1.41 U1.42 U1.43 U1.46 U2. U3. U3.4 U4. U4.A5 U4.A8 U4.B5 U4.B8 U5. U5.A5 U5.A8 U5.B5 U5.B8 U6.4

## Polygon pours and split planes (outlines as drawn)
+3.3 on Layer 2 "+3.3_L03_P002" (solid, remove dead copper, pour order 2): -737,2141 -734,2144 2051,2144 2051,-644 2045,-638 -736,-638
+5 on Layer 2 "+5_L03_P001" (solid, remove dead copper, pour order 1): 821,-22.16 995.16,-22.16 1195.81,-222.81 1913.81,-222.81 1938.74,-247.74 1938.74,-410.26 1929,-420 213,-420 152,-481 -577,-481 -722.95,-335.05 -722.95,1780 -435,1780 -349,1694 -349,671 -347,671 -258.67,582.67 -27.72,582.67 -27.72,573.72 -5,551 -5,447 -65,387 -222,387 -222,420 -484,682 -553,682 -553,-88 -499,-142 -482,-125 646,-125
GND on Top Layer "GND_L01_P004" (solid, remove dead copper, pour order 4): -737,2140.24 -733.24,2144 2051,2144 2051,-647 2047,-651 2043.46,-647.46 -747.99,-647.46
+3.3 on Top Layer "+3.3_L01_P003" (solid, remove dead copper, pour order 3): 1406.18,1453 1649,1453 1649,1077 1404.42,1077
GND on Bottom Layer "GND_L04_P005" (solid, remove dead copper, pour order 5): -738,2153 2058,2153 2065,2160 2069,2156 2069,-637 2049,-637 2023,-663 1997,-637 -725,-637
GND on Layer 1 "GND_L02_P000" (solid, remove dead copper, pour order 0): -737,2141 -720,2158 2044,2158 2044,-626 2058,-640 2047,-651 -748,-651

## Other copper
Top Layer:
  rectangle net GND: 841,-196 908,-126
  rectangle net +3.3: 1016,-90 1105,8
  rectangle net +5: 845,-87.39 964.09,-28
  rectangle net +5: 1675.85,-372.36 1702.85,-237.36
  rectangle net GND: 1644.35,-372.36 1671.35,-237.36
  rectangle net +5: 1864.82,-372.36 1891.82,-237.36
  rectangle net GND: 1896.32,-372.36 1923.32,-237.36
  rectangle net GND: 1369.97,-370 1396.97,-235
  rectangle net +5: 1338.47,-370 1365.47,-235
  rectangle net +5: 1149.5,-370 1176.5,-235
  rectangle net GND: 1118,-370 1145,-235
  pour cut-out: 1354,1621 1417.96,1557.04 1417.96,1463.2 1638.8,1463.2 1652,1450 1652,1093 1671,1074 1769,1074 1769,1298 1879,1408 1869,1418 1869,1772 1795,1772 1646,1623 1625,1623
  pour cut-out: 1684,180 1684,-72 1921.3,-72 1921.5,-72.2 1936,-57.71 1936,189
  pour cut-out: 1389,248 1399.19,237.81 1399.19,153.73 1401.27,153.73 1435,120 1435.9,120.9 1633.55,120.9 1633.55,137.55 1672,176 1659.14,188.86 1659.14,211.45 1595.55,211.45 1561,246
  pour cut-out: 1742,1152 1742,1096 1776.11,1061.89 1778,1061.89 1778,837 1920,695 1992,695 1992,1011 1999,1018 1950.18,1066.82 1950.18,1115.82 1946.09,1119.91
  pour cut-out: 521,1560 505,1544 505,1411 558,1411 593,1376 660,1443 660,1560
  pour cut-out: 32.96,1160.04 42,1151.01 42,760 -102,760 -86,776 -86,1117 -85,1118
  pour cut-out: -472,1095 -216.05,1095 -116,994.95 -116,764 -181,764 -248,697 -332,781 -337,781 -337,807 -460,930 -512,930 -512,1086 -514,1088
Layer 2:
  pour cut-out: -111,769 -107,765 -107,548 -86,548 -75,537 134,537 134,650 200,716 173,743 109,743 40.57,811.43 40.57,825.43 -34.43,825.43 -138.93,929.93 -138.93,896.42 -163.93,871.42 -113,820.49 -113,794
  pour cut-out: 916,1017 916,336 908,328 1309,328 1309,406 1355,452 1355,944.46 1258.33,1041.12

## Silkscreen, mask and mechanical layers (free items; w line width, h text height)
Top Overlay:
  lines w10: 1659,976 1659,1777
  text "for OpenMV" at 1632,1799.33 h40
  text "CAMERA" at 1002,1790.53 h27
  text "GND 5VV 5VV 5VV PD11 PB9 PB8 PC13 PA10 PA9 PA8 PE2 PE3 PB7 P6 PB5 PB4 PD4" at -395,1770 h26 r270
  text "GND 3V3 3V3" at -446,1763 h25 r270
  text "RGB LCD 2" at -231,1747 h27
  text "BOOT RST" at 1763,1593 h24 r90
  text "VREF PA0C PA1C  PA3 VBAT PC2C" at -447,1465 h20 r270
  text "SD CARD" at 346,1433.53 h27
  text "PD12 PD13 PG3" at 1639.89,1173 h22 r90
  text "3V3 P6 P5 P4 P3 P2 P1 P0" at 1707,994 h32 r90
  text "3V3 PA5 PB11 PB10 PB12 PB13 PB14 PB15" at 1597.89,990 h22 r90
  text "GND 5V P7 P8 P9 NC" at 1767,987 h32 r90
  text "PC1 PC3C PA2 PC2 PA1 PA0 PC3 PD6 PD5 PD7" at -445.87,866.13 h25 r270
  text "OLED" at 1813,733 h40 r90
  text "GND 3V3 PC5 PC4" at 1881,444 h27 r90
  text "KEY" at -278,-244 h27
  text "RGB LCD 1" at 360,-283.09 h27
  text "STM32" at 1194,-290 h27
  text "DAP" at 1751,-299 h27
Bottom Overlay:
  drawing of 86 lines, arcs and shapes, not listed
  text "STM32 H750" at 1601,1541 h60 r90
Mechanical 1:
  the board outline again, w10

## Text inside footprints (layer, text, board x,y; h text height)
P1: Top Overlay "k" at 703.14,1631.39 h30 r180; Top Overlay "8" at 653.16,1631.39 h30 r180; Top Overlay "7" at 609.16,1631.39 h30 r180; Top Overlay "6" at 567.16,1631.39 h30 r180; Top Overlay "5" at 525.16,1631.39 h30 r180; Top Overlay "4" at 483.16,1631.39 h30 r180; Top Overlay "3" at 436.16,1631.39 h30 r180; Top Overlay "2" at 394.16,1631.39 h30 r180; Top Overlay "1" at 351.16,1631.39 h30 r180